# Altium PCB 心动仪.PcbDoc
Units mil, origin at the board's own origin, x right, y up, seen from the top; angles counter-clockwise.
Board outline 6000 x 4000 mil, 2 copper layers (Top Layer, Bottom Layer); 37 components, 40 nets, 227 pads, 24 vias.
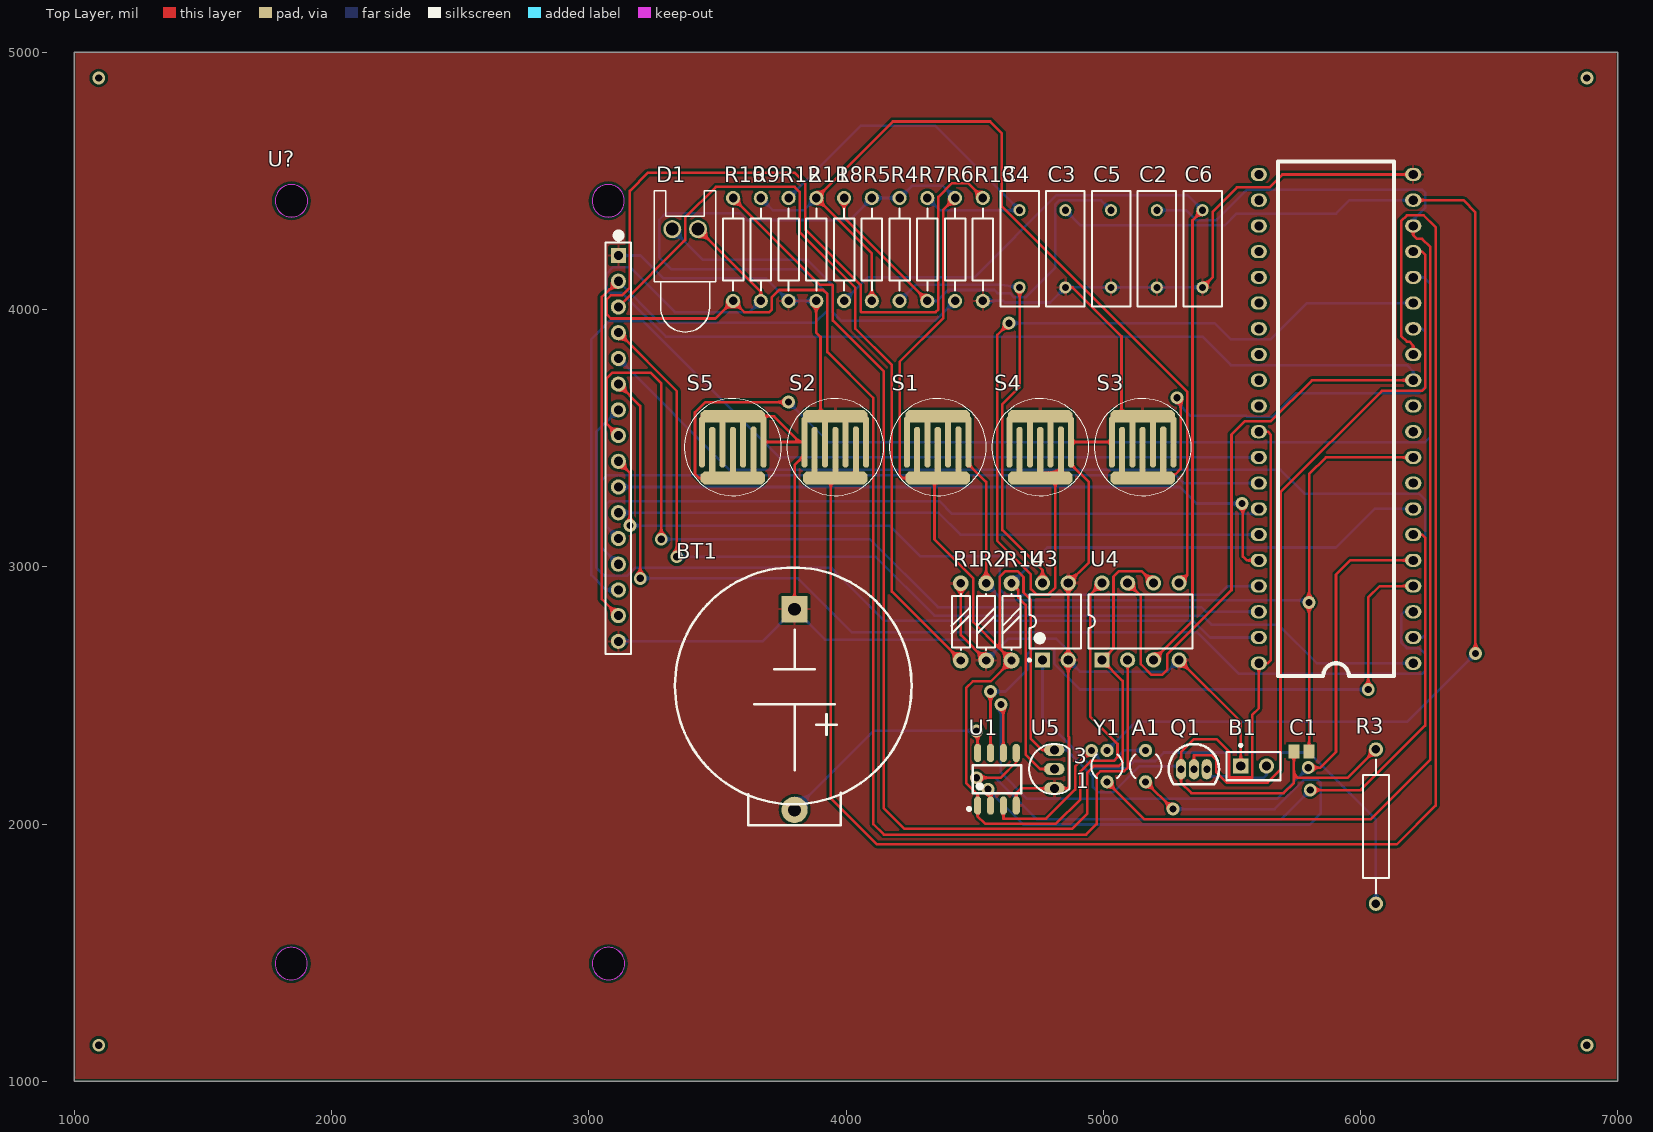
[diagram p0: Top Layer view]
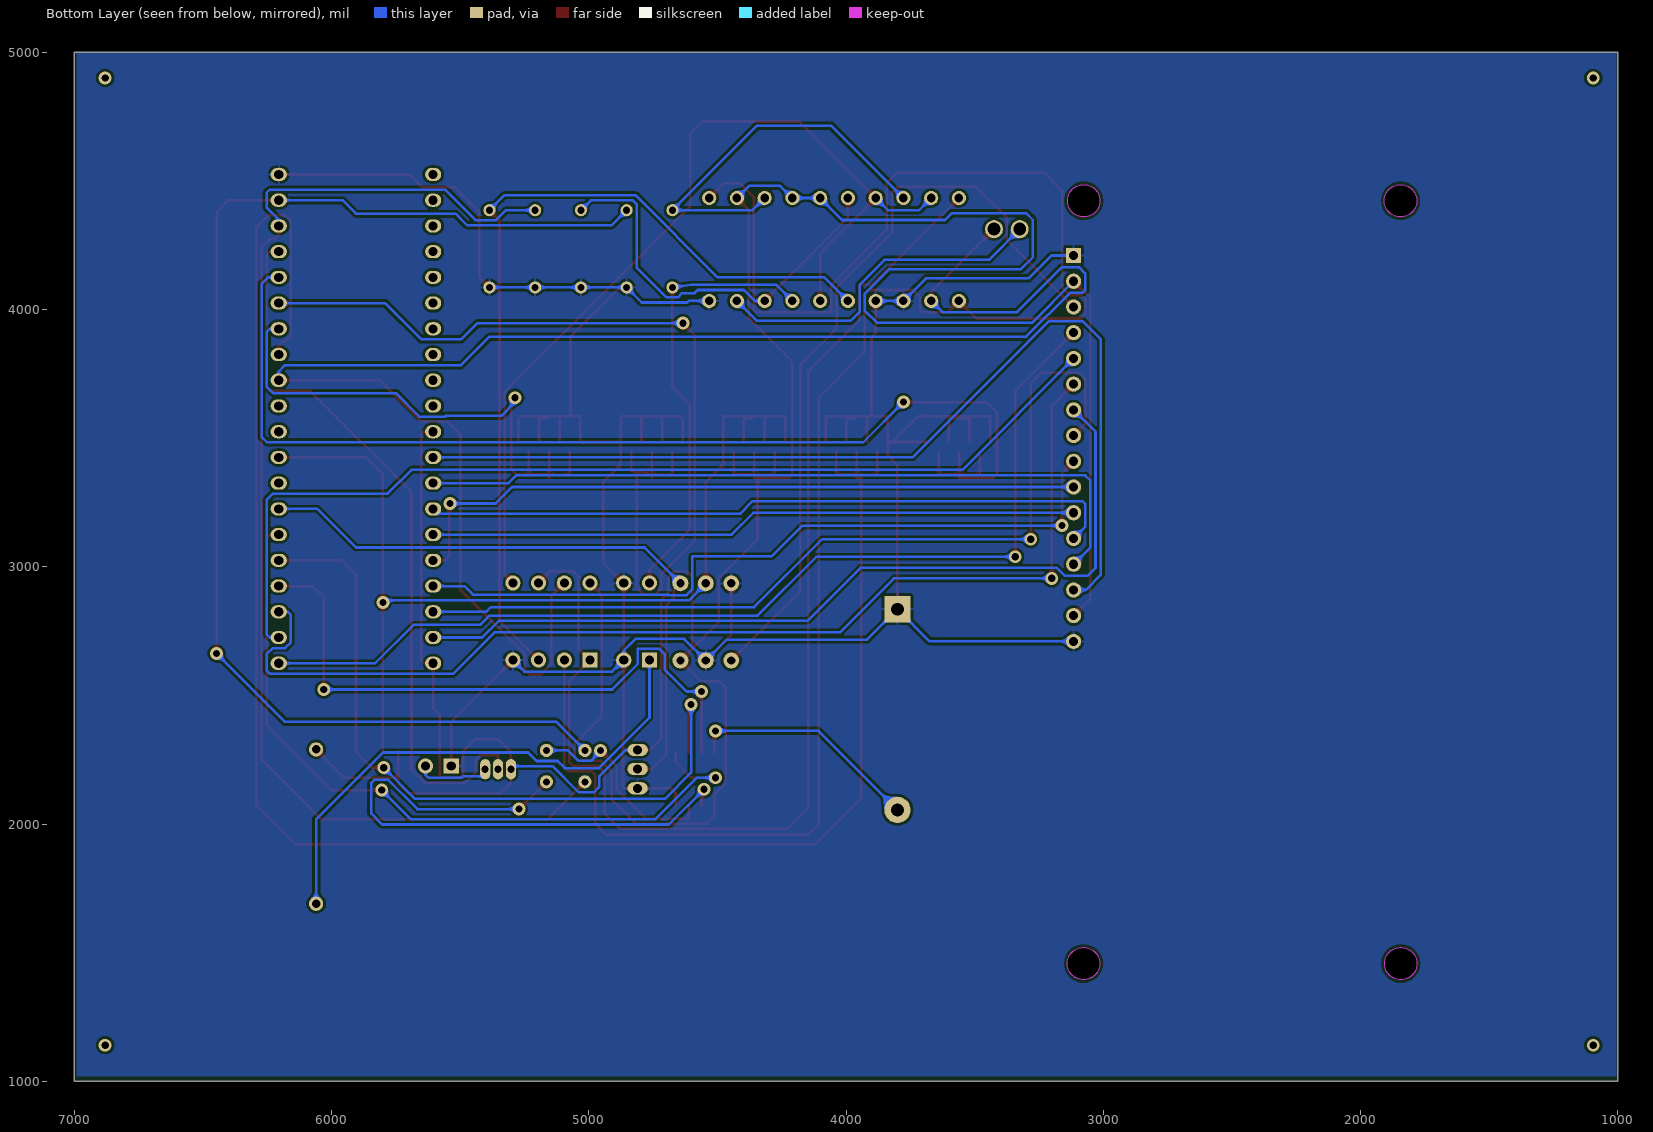
[diagram p1: Bottom Layer view, seen from below]

## Layer stack, top to bottom
Top Solder: solder mask 0.4, Solder Resist, Dk 3.5
Top Layer: signal copper 1.4
Dielectric 1: dielectric 12.6, FR-4, Dk 4.8
Bottom Layer: signal copper 1.4
Bottom Solder: solder mask 0.4, Solder Resist, Dk 3.5

## Board outline
1000,1000 7000,1000 7000,5000 1000,5000

## Design rules (kind name [scope] priority, off if disabled: settings)
Clearance [All] p1: gap=10 ignorepadtopadclearanceinfootprint=FALSE except(0: Arc-Hole Track-Hole SMDPad-Hole THPad-Hole Via-Hole Fill-Hole Poly-Hole Region-Hole Text-Hole)
PolygonConnect [All] p1: connectstyle=Relief reliefconductorwidth=10 reliefentries=4 polygonreliefangle="90 Angle" airgapwidth=10
RoutingVias [All] p1: holewidth=28 width=50 viastyle="Through Hole" minholewidth=28 minwidth=50 maxholewidth=28 maxwidth=50
SolderMaskExpansion [All] p1: expansion=4
Width [All] p1: maxlimit=10 minlimit=10 preferedwidth=10
30 further rules are at their usual default settings.

## Components (designator, comment, footprint, x,y, rotation, side; value= is the part's Value field where it differs from the comment)
A1 "XTAL" R38 5164.76,2225.1 r0 top
B1 "Bell" PIN2 5534.53,2225.16 r0 top
BT1 "Battery-N" BAT-CR2032 3800,2835 r0 top
C1 "Cap Pol3" C0805 5770.67,2282.25 r0 top value=10uF
C2 "Cap" RAD-0.3 5208.38,4236.06 r90 top value=20
C3 "Cap" RAD-0.3 4852.64,4236.06 r90 top value=20
C4 "Cap" RAD-0.3 4674.76,4236.06 r90 top value=10uF
C5 "Cap" RAD-0.3 5030.51,4236.06 r90 top value=1uF
C6 "Cap" RAD-0.3 5386.26,4236.06 r90 top value=1uF
D1 "LED0" LED-0 3374.58,4312.5 r0 top
Q1 "9012" TO-92(TO-92-3) 5352.59,2212.91 r0 top
R1 "Resistor" AXIAL-0.3 4446.16,2635.71 r90 top value=2K
R2 "Resistor" AXIAL-0.3 4544.91,2635.71 r90 top value=10K
R3 "330" AXIAL-0.6-R 6060,1990 r90 top
R4 "Res2" AXIAL-0.4 4208.27,4233.44 r90 top value=20K
R5 "Res2" AXIAL-0.4 4100.39,4233.44 r90 top value=20K
R6 "Res2" AXIAL-0.4 4424.01,4233.44 r90 top value=330
R7 "Res2" AXIAL-0.4 4316.14,4233.44 r90 top value=10K
R8 "Res2" AXIAL-0.4 3992.52,4233.44 r90 top value=10K
R9 "Res2" AXIAL-0.4 3668.9,4233.44 r90 top value=56K
R10 "Res2" AXIAL-0.4 3561.02,4233.44 r90 top value=100K
R11 "Res2" AXIAL-0.4 3884.64,4233.44 r90 top value=6.8K
R12 "Res2" AXIAL-0.4 3776.77,4233.44 r90 top value=24K
R13 "Res2" AXIAL-0.4 4531.89,4233.44 r90 top value=330
R14 "Resistor" AXIAL-0.3 4643.65,2635.71 r90 top value=10K
S1 "SW-PB" KEY-pad 4356.72,3585 r0 top
S2 "SW-PB" KEY-pad 3958.36,3585 r0 top
S3 "SW-PB" KEY-pad 5153.43,3585 r0 top
S4 "SW-PB" KEY-pad 4755.07,3585 r0 top
S5 "SW-PB" KEY-pad 3560,3585 r0 top
U1 "DS1302" SOP-8_150mil 4586.83,2173.92 r0 top
U3 "ST188" DIP-4 4814.03,2787.18 r90 top
U4 "LM358AD" DIP-8 4995.06,2637.18 r0 top
U5 "DS18B20" BCY-W3/E4 4809.94,2213.75 r0 top
U? "LCD1602" LCD1602 3115,3460 r90 top
Y1 "XTAL" R38 5014.83,2225.1 r0 top value=12M
? "89C51" DIP-40 6205,2625 r90 top

## Footprints (in the part's own frame and the unit in brackets; to place one, negate y for a bottom-side part, rotate by r counter-clockwise, add the part's x,y. Pads: shape width x height; smd on the part's side, far side on the other; paste and mask are expansions set on the pad)
AXIAL-0.3 [mil] "1/8W电阻"
  round 62 hole 32: 1(0,0) 2(300,0)
  silkscreen extent 41,-35 259,35, body extent -10,-39 310,39, height 89
AXIAL-0.4 [mm] "Axial Device, Thru-Hole; 2 Leads; 0.4 in Pin Spacing"
  round 1.4 hole 0.85: 1(-5.08,0) 2(5.08,0)
  silkscreen extent -4.06,-1.02 4.06,1.02
AXIAL-0.6-R [mm] "1W"
  round 1.4 hole 0.85: 1(-7.62,0) 2(7.62,0)
  silkscreen extent -6.6,-1.27 6.6,1.27, body extent -7.85,-2.25 7.85,2.25, height 5.25
BAT-CR2032 [mm] "CR2032电池座（未加焊）"
  rect 2.6x2.6 hole 1.27: 1(0,0)
  round 2.6 hole 1.27: 2(0,-19.812)
  silkscreen extent -11.81,-21.34 11.56,4.11, body extent -11.68,-21.34 11.68,4.06, height 3.5
BCY-W3/E4 [mm] "TO, Flat Index; 3 In-Line, Axial Leads; Body Dia. 4.5mm; Leads 0.51 x 0.48 mm (max)"
  oval 2x1.2 hole 0.9: 1(0,-1.905) 2(0,0) 3(-0.002,1.888)
  silkscreen extent -2.48,-2.48 1.5,2.48, body extent -2.48,-2.5 1.5,2.5, height 7
C0805 [mm] "Chip Capacitor, Body 2.0x1.3mm, IPC High Density"
  rect 1.1x1.4 smd: 1(-0.75,0) 2(0.75,0)
  body extent -1.1,-0.72 1.1,0.72, height 1.4
DIP-4 [mm] "DIP; 4 Leads; Row Spacing 7.62 mm; Pitch 2.54 mm"
  rect 1.5x1.5 hole 0.9: 1(-3.81,1.27)
  round 1.5 hole 0.9: 2(-3.81,-1.27) 3(3.81,-1.27) 4(3.81,1.27)
  silkscreen extent -3.93,-2.55 2.65,2.69, body extent -3.15,-2.5 3.15,2.5, height 5.6
DIP-8 [mm]
  rect 1.5x1.5 hole 0.9: 1(0,0)
  round 1.5 hole 0.9: 2(2.54,0) 3(5.08,0) 4(7.62,0) 5(7.62,7.62) 6(5.08,7.62) 7(2.54,7.62) 8(0,7.62)
  silkscreen extent -1.34,1.16 8.96,6.46, body extent -0.82,-0.22 8.45,7.84, height 3.8
DIP-40 [mm] "40脚直插芯片 间距2.54mm 600mil"
  oval 1.3x1.6 hole 0.9: 1(0,0) 2(2.54,0) 3(5.08,0) 4(7.62,0) 5(10.16,0) 6(12.7,0) 7(15.24,0) 8(17.78,0) 9(20.32,0) 10(22.86,0) 11(25.4,0) 12(27.94,0) 13(30.48,0) 14(33.02,0) 15(35.56,0) 16(38.1,0) 17(40.64,0) 18(43.18,0) 19(45.72,0) 20(48.26,0) 21(48.26,15.24) 22(45.72,15.24) 23(43.18,15.24) 24(40.64,15.24) 25(38.1,15.24) 26(35.56,15.24) 27(33.02,15.24) 28(30.48,15.24) 29(27.94,15.24) 30(25.4,15.24) 31(22.86,15.24) 32(20.32,15.24) 33(17.78,15.24) 34(15.24,15.24) 35(12.7,15.24) 36(10.16,15.24) 37(7.62,15.24) 38(5.08,15.24) 39(2.54,15.24) 40(0,15.24)
  silkscreen extent -1.27,1.91 49.53,13.34, body extent -1.22,-1.18 49.48,16.42, height 8.5
KEY-pad [mm]
  oct 0.6x5 on Top Paste: 0(-3.048,-2.54) 0(-2.032,-3.556) 0(-1.011,-2.54) 0(0,-3.556) 0(1.016,-2.54) 0(2.032,-3.505) 0(3.048,-2.54)
  oct 0.6x5 smd: 1(-3.048,-2.54) 1(-1.016,-2.54) 1(1.016,-2.54) 1(3.048,-2.54) 2(-2.032,-3.556) 2(0,-3.556) 2(2.032,-3.505)
  oct 6.35x1.27 smd: 1(0,0) 2(0,-6.096)
  oct 6.35x1.27 on Top Paste: 1(0,0) 2(0,-6.096)
  rect 6.5x6.6 on Top Solder: 80(0.002,-2.953)
  silkscreen extent -4.78,-7.83 4.8,1.75
LCD1602 [mm] "LCD1602"
  rect 1.5x1.5 hole 0.9: 1(19.05,0)
  round 1.5 hole 0.9: 2(16.51,0) 3(13.97,0) 4(11.43,0) 5(8.89,0) 6(6.35,0) 7(3.81,0) 8(1.27,0) 9(-1.27,0) 10(-3.81,0) 11(-6.35,0) 12(-8.89,0) 13(-11.43,0) 14(-13.97,0) 15(-16.51,0) 16(-19.05,0)
  Keep-Out Layer circle w0.1: c24.451,32.274 r1.6
  Keep-Out Layer circle w0.1: c24.451,1 r1.6
  Keep-Out Layer circle w0.1: c-50.867,0.974 r1.6
  Keep-Out Layer circle w0.1: c-50.867,32.3 r1.6
  Keep-Out Layer board cut-out: 22.851,32.274 22.973,31.662 23.32,31.143 23.839,30.796 24.451,30.674 24.451,30.674 25.063,30.796 25.582,31.143 25.929,31.662 26.051,32.274 26.051,32.274 25.929,32.886 25.582,33.406 25.063,33.752 24.451,33.874 24.451,33.874 23.839,33.752 23.32,33.406 22.973,32.886 22.851,32.274
  Keep-Out Layer board cut-out: 22.851,1 22.973,0.388 23.32,-0.132 23.839,-0.478 24.451,-0.6 24.451,-0.6 25.063,-0.478 25.582,-0.132 25.929,0.388 26.051,1 26.051,1 25.929,1.612 25.582,2.131 25.063,2.478 24.451,2.6 24.451,2.6 23.839,2.478 23.32,2.131 22.973,1.612 22.851,1
  Keep-Out Layer board cut-out: -52.467,0.974 -52.345,0.362 -51.998,-0.157 -51.479,-0.504 -50.867,-0.626 -50.867,-0.626 -50.255,-0.504 -49.736,-0.157 -49.389,0.362 -49.267,0.974 -49.267,0.974 -49.389,1.587 -49.736,2.106 -50.255,2.453 -50.867,2.574 -50.867,2.574 -51.479,2.453 -51.998,2.106 -52.345,1.587 -52.467,0.974
  Keep-Out Layer board cut-out: -52.467,32.3 -52.345,31.687 -51.998,31.168 -51.479,30.821 -50.867,30.7 -50.867,30.7 -50.255,30.821 -49.736,31.168 -49.389,31.687 -49.267,32.3 -49.267,32.3 -49.389,32.912 -49.736,33.431 -50.255,33.778 -50.867,33.9 -50.867,33.9 -51.479,33.778 -51.998,33.431 -52.345,32.912 -52.467,32.3
  silkscreen extent -20.32,-1.27 21.47,1.27, body extent -53.46,-1.61 27.04,34.89, height 10.52
LED-0 [mil] "LED; 2 Leads"
  round 70 hole 50: 1(50,0) 2(-50,0)
  silkscreen extent -120,-400 120,150
PIN2 [mm] "Photosensitive Diode; 2 Leads"
  rect 1.5x1.5 hole 0.9: 1(0,0)
  round 1.5 hole 0.9: 2(2.54,0)
  silkscreen extent -1.4,-1.4 3.94,2.17
R38 [mm] "Crystal, Thru-Hole; 2 Leads; Body 3.1 x 8.2 mm (Dia.xH)"
  round 1.3 hole 0.7: 1(0,1.55) 2(0,-1.55)
  silkscreen extent -1.55,-1.19 1.55,1.17
RAD-0.3 [mm] "Radial Cap, Thru-Hole; 2 Leads; 0.3 in Pin Spacing"
  round 1.2 hole 0.7: 1(-3.81,0) 2(3.81,0)
  silkscreen extent -5.71,-1.91 5.72,1.9
SOP-8_150mil [mm]
  oval 0.7x1.8 smd: 1(-1.905,-2.6) 2(-0.635,-2.6) 3(0.635,-2.6) 4(1.905,-2.6) 5(1.905,2.6) 6(0.635,2.6) 7(-0.635,2.6) 8(-1.905,2.6)
  silkscreen extent -2.9,-3.07 2.4,1.4, body extent -2.5,-3.1 2.5,3.1, height 1.75
TO-92(TO-92-3) [mm]
  oval 1x2 hole 0.7 mask+0.051: 1(-1.27,0) 2(0,0) 3(1.27,0)
  silkscreen extent -2.48,-1.5 2.48,2.48, body extent -2.61,-1.6 2.61,2.6, height 8

## Part data
A1 Y1: "Crystal Oscillator", LatestRevisionDate=17-Jul-2002, LatestRevisionNote="Re-released for DXP Platform.", PackageDescription="Crystal, Thru-Hole; 2 Leads; Body 3.1 x 8.2 mm (Dia.xH)", PackageReference=R38, Published=8-Jun-2000, Publisher="Altium Limited"
B1: "Electrical Bell", LatestRevisionDate=17-Jul-2002, LatestRevisionNote="Re-released for DXP Platform.", PackageReference=PIN2, Published=24-Mar-1999, Publisher="Altium Limited"
BT1: "Multicell Battery", Published=24-Mar-1999, Publisher="Altium Limited", Revision="July-2002: Re-released for DXP Platform."
C1: "Polarized Capacitor (Surface Mount)", LatestRevisionDate=29-May-2009, LatestRevisionNote="IPC-7351 Footprint Added.", PackageDescription="Chip Capacitor", PackageReference=C0805, Published=8-Jun-2000, Publisher="Altium Limited"
C2 C3 C4 C5 C6: "Capacitor", LatestRevisionDate=17-Jul-2002, LatestRevisionNote="Re-released for DXP Platform.", PackageDescription="Radial Cap, Thru-Hole; 2 Leads; 0.3 in Pin Spacing", PackageReference=RAD-0.3, Published=8-Jun-2000, Publisher="Altium Limited"
D1: "Typical INFRARED GaAs LED", LatestRevisionDate=08-Jul-2005, LatestRevisionNote="Mech Layer 1 removed.", PackageDescription="LED; 2 Leads", PackageReference=LED-0, Published=8-Jun-2000, Publisher="Altium Limited"
Q1: library part 9012_TO-92, "PNP型小功率三极管", datasheet=http://pdf1.alldatasheetcn.com/datasheet-pdf/view/311757/DAYA/9012.html
R3: library part Res2_1W, "Resistor 直插电阻 1W", LatestRevisionDate=17-Jul-2002, LatestRevisionNote="Re-released for DXP Platform.", PackageReference=AXIAL-0.4, Published=8-Jun-2000, Publisher="Altium Limited"
R4 R5 R6 R7 R8 R9 R10 R11 R12 R13: "Resistor", LatestRevisionDate=17-Jul-2002, LatestRevisionNote="Re-released for DXP Platform.", PackageDescription="Axial Device, Thru-Hole; 2 Leads; 0.4 in Pin Spacing", PackageReference=AXIAL-0.4, Published=8-Jun-2000, Publisher="Altium Limited"
S1 S2 S3 S4 S5: "Switch", Published=24-Mar-1999, Publisher="Altium Limited", Revision="July-2002: Re-released for DXP Platform."
U1: "DS1302 实时时钟"
U3: library part Optoisolator1, "4-Pin Phototransistor Optocoupler", DatasheetVersion=Nov-2003, LatestRevisionDate=04-Mar-2005, LatestRevisionNote="Sch pins 3 & 4 Swapped.", PackageReference=DIP-4, Published=24-Mar-1999, Publisher="Altium Limited"
U4: "Dual Operational Amplifier", PackageDocument=Jan-1998, ComponentLink1Description="Manufacturer Link", ComponentLink1URL=http://www.ti.com/, DatasheetDocument=Aug-1988, LatestRevisionDate=4-Mar-2005, LatestRevisionNote="Stylized 3D Model Added.", PackageReference=D008, Published=15-Apr-2002, Publisher="Altium Limited"
R1 R2 R14: Published=8-Jun-2000, Publisher="Altium Limited", Revision="July-2002: Re-released for DXP Platform."

## Via types
v1: diameter 50, hole 28, Top Layer to Bottom Layer, 24 vias

## Nets (pads, with @x,y where several pads share a name; then routed paths per layer and width w, separated by ;. In a path a pad name is that pad's centre, name@x,y a point inside that pad or via, vN(x,y) a via of type N, cw(c..) or ccw(c..) an arc to the next point about the centre after c; other vN are vias at no path point)
GND: ?.20 B1.1 BT1.1 C2.1 C3.1 C5.1 C6.1 R1.2 R2.1 R11.1 R12.1 R13.1 S2.1@3838.36,3485 S2.1@3918.36,3485 S2.1@3958.36,3585 S2.1@3998.36,3485 S2.1@4078.36,3485 S3.1@5033.43,3485 S3.1@5113.43,3485 S3.1@5153.43,3585 S3.1@5193.43,3485 S3.1@5273.43,3485 S4.1@4635.07,3485 S4.1@4715.07,3485 S4.1@4755.07,3585 S4.1@4795.07,3485 S4.1@4875.07,3485 S5.1@3440,3485 S5.1@3520,3485 S5.1@3560,3585 S5.1@3600,3485 S5.1@3680,3485 U1.4 U3.2 U3.3 U4.4 U5.1 U?.1 U?.16 | length 12655.4
  Top Layer w10: S5.1@3440,3485 3440,3585 S5.1@3560,3585 ; S5.1@3520,3485 3520,3578 3553,3578 S5.1@3560,3585 ; S5.1@3600,3485 3600,3578 3567,3578 S5.1@3560,3585 ; S5.1@3680,3485 3820,3485 ; BT1.1 3800,3395.64 3838.36,3434 S2.1@3838.36,3485 ; R11.1 3884,4033.44 3884,3911 3901,3894 S2.1@3901,3585 ; S2.1@3918.36,3485 S2.1@3918.36,3585 ; S2.1@3998.36,3485 3998.36,3578 3965.36,3578 S2.1@3958.36,3585 ; S2.1@4078.36,3485 4078.36,3585 S2.1@3958.36,3585 ; R1.2 4446.16,2734.45 R2.1 ; S4.1@4635.07,3485 4635.07,3575.07 4645,3585 S4.1@4715,3585 ; U1.4 4661.83,2120.58 4680,2138.75 U5.1 4860,2138.75 4867,2145.75 4867,2338.03 4864.03,2341 U3.2 U3.3 4944,3017.15 4944,3329.07 4875.07,3398 S4.1@4875.07,3485 ; S4.1@4715.07,3485 4715.07,3535 4715,3535.07 S4.1@4715,3585 ; S4.1@4795.07,3485 S4.1@4795.07,3585 ; C3.1 4880.94,4086.06 5071,3896 S3.1@5071,3585 ; S3.1@5113.43,3485 S3.1@5113.43,3585 ; S3.1@5193.43,3485 5193.43,3578 5160.43,3578 S3.1@5153.43,3585 ; S3.1@5273.43,3485 5273.43,3574.57 5263,3585 S3.1@5153.43,3585 ; U4.4 5534.53,2397.71 B1.1 ; C6.1 5425,4124.81 5425,4380 5520,4475 5646,4475 5696,4525 ?.20 ; S5.1@3560,3585 3720,3585 3820,3485 ; 3820,3485 S2.1@3838.36,3485 ; S2.1@3838.36,3485 3838.36,3585 S2.1@3901,3585 ; S2.1@3901,3585 S2.1@3918.36,3585 ; S2.1@3918.36,3585 S2.1@3958.36,3585 ; S4.1@4715,3585 4755.07,3585 S4.1@4795.07,3585 ; S4.1@4795.07,3585 4875.07,3585 S4.1@4875.07,3485 ; S4.1@4875.07,3485 5033.43,3485 5033.43,3585 S3.1@5071,3585 ; S3.1@5071,3585 S3.1@5113.43,3585 ; S3.1@5113.43,3585 S3.1@5153.43,3585
  Bottom Layer w10: U?.16 3675,2710 BT1.1 3918,2717 4463.62,2717 R2.1 4629.2,2720 4818.1,2720 4864.03,2674.07 U3.2 4909.22,2592 5249.88,2592 U4.4 ; U?.1 3201,4210 3290,4121 3689.21,4121 R12.1 R11.1 ; R13.1 4611.11,4033.44 4617.11,4027.44 4794.01,4027.44 C3.1 C5.1 C2.1 C6.1
Net_1: ?.1 U?.4 | length 3999.5
  Top Layer w10: U?.4 3342,3683 v1(3342,3039)
  Bottom Layer w10: v1(3342,3039) 4115,3039 4344,2810 5385,2810 5420,2775 5680,2775 5830,2625 ?.1
Net_2: ?.2 U?.5 | length 3939.8
  Bottom Layer w10: U?.5 3548,3377 5689,3377 5782,3284 6228,3284 6252,3260 6252,2737 6240,2725 ?.2
Net_3: ?.3 U?.6 | length 4336.9
  Top Layer w10: U?.6 3200,3625 v1(3200,2955)
  Bottom Layer w10: v1(3200,2955) 3814,2955 4024,2745 5366,2745 5527,2584 6240,2584 6252,2596 6252,2660 6228,2684 6180,2684 6158,2706 6158,2813 6170,2825 ?.3
Net_4: ?.4 U1.7 | length 2462.3
  Top Layer w10: U1.7 v1(4561.83,2515) ; v1(6030,2523) 6030,2880 6075,2925 ?.4
  Bottom Layer w10: v1(4561.83,2515) 4620,2515 4705,2600 4705,2660 4727,2682 4809,2682 4809,2623 4909,2523 v1(6030,2523)
Net_5: ?.5 U1.6 | length 2889.2
  Top Layer w10: v1(4602,2464) 4611.83,2454.17 U1.6 ; v1(5797,2219) 5844,2219 5905,2280 5905,2970 5960,3025 ?.5
  Bottom Layer w10: v1(4602,2464) 4602,2200 4704,2098 5676,2098 v1(5797,2219)
Net_6: ?.6 U1.5 | length 2960.8
  Top Layer w10: v1(4507,2180) 4601.83,2180 4661.83,2240 U1.5 ; v1(5805,2132) 6001,2132 6251.5,2382.5 6251.5,3113.5 6240,3125 ?.6
  Bottom Layer w10: v1(4507,2180) 4580.08,2180 4742.08,2018 5691,2018 v1(5805,2132)
Net_7: ?.7 R14.2 U5.2 | length 2504.2
  Top Layer w10: R14.2 4669.56,2909.8 4669.56,2880.44 4698,2852 4698,2270.75 4755,2213.75 U5.2
  Bottom Layer w10: R14.2 4782.94,3075 5905,3075 6055,3225 ?.7
Net_9: ?.9 C1.2 R2.2 S1.1@4236.72,3485 S1.1@4316.72,3485 S1.1@4356.72,3585 S1.1@4396.72,3485 S1.1@4476.72,3485 | length 4049.1
  Top Layer w10: S1.1@4236.72,3485 4236.72,3585 S1.1@4316.72,3585 ; S1.1@4316.72,3485 S1.1@4316.72,3585 ; S1.1@4396.72,3485 4396.72,3578 4363.72,3578 S1.1@4356.72,3585 ; R2.2 4544.91,3329.81 4476.72,3398 4476.72,3485 4476.72,3585 S1.1@4356.72,3585 ; C1.2 v1(5800.19,2861.23) 5800.19,3360 5865.19,3425 ?.9 ; S1.1@4316.72,3585 S1.1@4356.72,3585
  Bottom Layer w10: R2.2 4610.91,2869.71 5791.71,2869.71 v1(5800.19,2861.23)
Net_12: ?.12 D1.1 R9.1 U4.7 | length 6722
  Top Layer w10: D1.1 3668.9,4068.19 R9.1 ; U4.7 5146,2886.24 5146,2621 5187,2580 5229,2580 5249,2600 5249,2660 5498.5,2909.5 5498.5,3513.5 5551,3566 5652,3566 5811,3725 ?.12
  Bottom Layer w10: R9.1 3625.45,3990 3335,3990 3160,4165 3095,4165 3070,4140 3070,4075 3080,4065 3129,4065 3299.55,3894.45 5385.55,3894.45 5496,3784 6181,3784 6205,3760 ?.12
Net_13: ?.13 S2.2@3878.36,3445 S2.2@3958.36,3345 S2.2@3958.36,3445 S2.2@4038.36,3447 | length 7139.5
  Top Layer w10: S2.2@3878.36,3445 3878.36,3358 3879.45,3358.01 3958.18,3359 S2.2@3958.36,3359 ; S2.2@3958.36,3445 S2.2@3958.36,3359 ; S2.2@4038.36,3447 4038.36,3359 S2.2@3958.36,3359 ; ?.13 6205,3860 6190,3875 6180,3875 6158,3897 6158,4344 6180,4366 6246,4366 6292,4320 6292,2072 6141,1921 4120,1921 3941,2100 3941,3345 3958.36,3345 S2.2@3958.36,3359
Net_14: ?.14 S3.2@5073.43,3445 S3.2@5153.43,3345 S3.2@5153.43,3445 S3.2@5233.43,3447 | length 2112.3
  Top Layer w10: S3.2@5073.43,3445 5073.43,3358 5074.52,3358.01 5153.26,3359 S3.2@5153.43,3359 ; S3.2@5153.43,3345 S3.2@5153.43,3359 ; S3.2@5153.43,3445 S3.2@5153.43,3359 ; S3.2@5233.43,3447 S3.2@5233.43,3359 ; v1(5287,3657) 5301,3643 5301,3380 5280,3359 S3.2@5233.43,3359 ; S3.2@5153.43,3359 S3.2@5233.43,3359
  Bottom Layer w10: v1(5287,3657) 5287,3640 5340,3587 5556,3587 5559,3584 5659,3584 5750,3675 6227,3675 6252,3700 6252,3913 6240,3925 ?.14
Net_15: ?.15 S4.2@4675.07,3445 S4.2@4755.07,3345 S4.2@4755.07,3445 S4.2@4835.07,3447 | length 3753.5
  Top Layer w10: v1(4634,3947) 4588,3901 4588,3101 4719,2970 4719,2913 4740,2892 4786,2892 4814,2920 4814,3372 ; S4.2@4675.07,3445 4675.07,3358 4676.16,3358.01 4754.9,3359 S4.2@4755.07,3359 ; S4.2@4755.07,3345 S4.2@4755.07,3359 ; S4.2@4755.07,3445 S4.2@4755.07,3359 ; S4.2@4835.07,3447 4835.07,3372 4814,3372 ; S4.2@4755.07,3359 4773.17,3362.99 4814,3372
  Bottom Layer w10: v1(4634,3947) 5433,3947 5496,3884 5651,3884 5792,4025 ?.15
Net_16: ?.16 S5.2@3480,3445 S5.2@3560,3345 S5.2@3560,3445 S5.2@3640,3447 | length 4449.5
  Top Layer w10: S5.2@3480,3445 3480,3358 3481.09,3358.01 3559.82,3359 S5.2@3560,3359 ; S5.2@3560,3445 S5.2@3560,3359 ; S5.2@3640,3447 3640,3359 S5.2@3560,3359 ; v1(3777,3640) 3453,3640 3413,3600 3413,3360 3428,3345 3560,3345 S5.2@3560,3359
  Bottom Layer w10: v1(3777,3640) 3933,3484 6251,3484 6272,3505 6272,4100 6247,4125 ?.16
Net_17: ?.17 Q1.2 | length 2863.3
  Top Layer w10: Q1.2 5352.59,2268 5420,2268 5440,2248 5440,2200.63 5480,2160.63 5638.63,2160.63 5689,2211 5689,3290 6083,3684 6240,3684 6251.5,3695.5 6251.5,4213.5 6240,4225 ?.17
Net_18: ?.18 C2.2 Y1.2 | length 4789.4
  Top Layer w10: Y1.2 5160.91,2018 6039,2018 6271.5,2250.5 6271.5,4243.5 6240,4275 6220,4275 6205,4290 ?.18
  Bottom Layer w10: C2.2 5321.57,4386.06 5360.19,4347.44 5440.44,4347.44 5559,4466 6240,4466 6252,4454 6252,4396 6205,4349 ?.18
Net_19: ?.19 C3.2 Y1.1 | length 4981.8
  Top Layer w10: ?.19 6400,4425 6447,4378 v1(6447,2663)
  Bottom Layer w10: C3.2 4911.26,4327.44 5472.44,4327.44 5518,4373 5905,4373 5957,4425 ?.19 ; Y1.1 5125.71,2397 6181,2397 v1(6447,2663)
Net_32: ?.32 U?.14 | length 3889.9
  Bottom Layer w10: U?.14 3067.47,2910 3010,2967.47 3010,3885 3080,3955 3210.71,3955 3740.71,3425 ?.32
Net_33: ?.33 U?.13 | length 2927.6
  Bottom Layer w10: U?.13 3050,3075 3050,3335 3070,3355 5282,3355 5312,3325 ?.33
Net_34: ?.34 U?.12 | length 2732.4
  Bottom Layer w10: U?.12 3070,3155 3070,3245 3080,3255 4363,3255 4412.23,3205.77 5594.98,3205.77 5594.98,3225 ?.34
Net_35: ?.35 U?.11 | length 2525.2
  Bottom Layer w10: U?.11 4360,3210 4445,3125 ?.35
Net_36: ?.36 U?.10 | length 2726.4
  Top Layer w10: v1(5539,3246) 5543,3242 5543,3040 5558,3025 ?.36
  Bottom Layer w10: U?.10 5298,3310 5362,3246 v1(5539,3246)
Net_37: ?.37 U?.9 | length 2914.8
  Top Layer w10: U?.9 3160,3365 v1(3160,3160)
  Bottom Layer w10: v1(3160,3160) 4169,3160 4288,3041 4596,3041 4597,3040 4597,2912.71 4620,2889.71 4690,2889.71 4692.29,2892 5450,2892 5483,2925 ?.37
Net_38: ?.38 U?.8 | length 3525.6
  Top Layer w10: U?.8 3070.47,3554.53 3070.47,3733.47 3092,3755 3240,3755 3282,3713 v1(3282,3107)
  Bottom Layer w10: v1(3282,3107) 4093,3107 4357,2843 5381,2843 5399,2825 ?.38
Net_39: ?.39 U?.7 | length 3362.1
  Bottom Layer w10: U?.7 3030,3525 3030,2996 3061,2965 3149,2965 3180,2996 3944,2996 4150,2790 5350,2790 5415,2725 ?.39
NetA1_1: A1.1 U1.3 | length 803
  Top Layer w10: U1.3 4611.83,2021.12 4778.08,2021.12 4890.96,2134 4890.96,2222.96 v1(4954,2286)
  Bottom Layer w10: v1(4954,2286) 4960,2286 4988.47,2245.53 5040.53,2245.53 5081.12,2286.12 A1.1
NetA1_2: A1.2 U1.2 | length 2331
  Top Layer w10: v1(4552,2135) 4561.83,2125.17 U1.2 ; A1.2 v1(5270.83,2058)
  Bottom Layer w10: v1(4552,2135) 4689,1998 5803,1998 5845,2040 5845,2160 5833,2172 5780,2172 5666,2058 v1(5270.83,2058)
NetB1_2: B1.2 Q1.3 | length 301.2
  Bottom Layer w10: Q1.3 5402.59,2185 5490,2185 5495,2180 5624.53,2180 5634.53,2190 B1.2
NetBT1_2: BT1.2 U1.8 | length 921.9
  Top Layer w10: v1(4507,2362) 4511.83,2357.17 U1.8
  Bottom Layer w10: BT1.2 4107,2362 v1(4507,2362)
NetC4_1: C4.1 R4.1 U3.4 | length 1734.2
  Top Layer w10: C4.1 4674.76,3698.76 4608,3632 4608,3143 4764.03,2986.97 U3.4
  Bottom Layer w10: R4.1 4270.83,4096 4601,4096 C4.1
NetC4_2: C4.2 R7.2 R12.2 | length 1529.1
  Bottom Layer w10: R12.2 4058.33,4715 4345.83,4715 C4.2 4363.52,4386.06 R7.2
NetC5_2: C5.2 R7.1 R8.2 | length 1594.2
  Top Layer w10: R8.2 3992.52,4357.06 R7.1
  Bottom Layer w10: R7.1 4354.44,4033.44 4397,4076 4577,4076 4589,4064 4637,4064 4653.56,4047.44 4697.44,4047.44 4814.01,4164.01 4814.01,4410 4828.7,4424.69 4991.89,4424.69 C5.2
NetC6_2: C6.2 R8.1 U4.3 | length 3416.4
  Top Layer w10: U4.3 5347,2789.12 5347,4346.81 C6.2
  Bottom Layer w10: R8.1 4084.08,4125 4498.85,4125 4818.53,4444.69 5327.64,4444.69 C6.2
NetD1_2: D1.2 R6.1 | length 1340.8
  Bottom Layer w10: D1.2 3444.08,4193 3850.21,4193 3947.2,4096 3947.2,3990.8 3981.99,3956.01 4346.59,3956.01 R6.1
NetR1_1: R1.1 U?.3 | length 3038.9
  Top Layer w10: U?.3 3374.58,4269.58 3374.58,4357.58 3494,4477 3800,4477 3820,4457 3820,4301 4036,4085 4036,3926 4178,3784 4178,2903.87 R1.1
NetR3_1: R3.1 U3.1 | length 2061.9
  Bottom Layer w10: U3.1 4764.03,2413.25 4960,2217.29 5093.27,2217.29 5120.98,2245 5203,2245 5236,2278 5800,2278 6060,2018 R3.1
NetR5_1: R5.1 R9.2 R11.2 U4.5 | length 3667.8
  Top Layer w10: R5.1 4100.39,4217.69 R11.2 4182.2,4731 4560,4731 4606,4685 4606,4400 5327,3679 5327,2969.12 U4.5
  Bottom Layer w10: R9.2 3716.34,4386 3837.2,4386 R11.2
NetR10_1: R10.1 R13.2 U4.2 | length 7580.6
  Top Layer w10: R13.2 4474.33,4491 4412,4491 4358.7,4437.7 4358.7,4000 4348.7,3990 4060,3990 4057,3993 4057,4096 3842,4311 3842,4490 3800,4532 3231,4532 3160,4461 3160,4085 3130,4055 3085.47,4055 3070.47,4040 3070.47,3980 3085.47,3965 3492.58,3965 R10.1 3604.46,3990 3702,3990 3712,4000 3712,4048 3740,4076 3911.2,4076 3927.2,4060 3927.2,3834.8 4106,3656 4106,2000 4147,1959 4933,1959 4974,2000 4974,2190 4989,2205 5081,2205 5096,2220 5096,2602 5095.06,2602.94 U4.2
NetR10_2: R10.2 U4.1 U4.6 | length 4762
  Top Layer w10: R10.2 3898.46,4096 3947.2,4096 3949,4094.21 3949,3957 4147,3759 4147,2061 4226.88,1981.12 4879.12,1981.12 4938,2040 4938,2200 4963.53,2225.53 5060.95,2225.53 5075.43,2240 5075.43,2556.81 U4.1 5040,2682.12 5040,2962 5060,2982 5150.24,2982 U4.6
VCC: ?.31 ?.40 C1.1 Q1.1 R3.2 R4.2 R5.2 R6.2 R14.1 S1.2@4276.72,3445 S1.2@4356.72,3345 S1.2@4356.72,3445 S1.2@4436.72,3447 U1.1 U4.8 U5.3 U?.2 U?.15 | length 13930.2
  Top Layer w10: U?.15 3050.47,2874.53 3050.47,4048.92 3080,4078.44 3083.44,4078.44 U?.2 ; S1.2@4276.72,3445 4276.72,3358 4277.8,3358.01 4356.54,3359 S1.2@4356.72,3359 ; S1.2@4356.72,3445 S1.2@4356.72,3359 ; R6.2 4378.7,4388.13 4378.7,3967.1 4209,3797.4 4209,3356 4220,3345 S1.2@4344,3345 ; S1.2@4436.72,3447 4436.72,3359 S1.2@4356.72,3359 ; U5.3 4762,2288.09 4719,2331.09 4719,2871 4690,2900 4690,2960 4668,2982 4619,2982 4597,2960 4597,2682.36 ; U4.8 4950,2892.12 4950,2416.71 5055.43,2311.29 5055.43,2260 5040.95,2245.53 4952.53,2245.53 4910.96,2203.96 4910.96,2095.96 4816.12,2001.12 4540.71,2001.12 4511.83,2030 U1.1 4511.83,2115.17 4467,2160 4467,2528.66 4493.34,2555 4562.94,2555 R14.1 4597,2682.36 ; ?.31 5640,3525 5652,3513 5652,2637 5640,2625 ?.40 5605,2450 5580,2425 5580,2180.63 5489,2180.63 5489,2281 5440,2330 5352.59,2330 5302.59,2280 Q1.1 5302.59,2160 5342.59,2120 5701.14,2120 5741.14,2160 5741.14,2194.86 ; C1.1 5741.14,2194.86 ; R3.2 5949,2179 5757,2179 5741.14,2194.86 ; S1.2@4344,3345 4356.72,3345 S1.2@4356.72,3359 ; S1.2@4344,3345 4344,3106 4495,2955 4495,2784.36 4597,2682.36
  Bottom Layer w10: U?.2 3275.8,3949.2 3880,3949.2 3927.2,3996.41 3927.2,4060 3830.2,4157 3320,4157 3274,4203 3274,4349 3300,4375 3588,4375 3615,4348 4014.95,4348 R5.2 R4.2 4255.82,4481 4376.46,4481 R6.2 ; U5.3 4856.91,2288.09 4960,2185 4960,2143.48 4980,2123.48 5039.46,2123.48 5140.98,2225 5302.59,2225 Q1.1
pads on no net: ?.8 ?.10 ?.11 ?.21 ?.22 ?.23 ?.24 ?.25 ?.26 ?.27 ?.28 ?.29 ?.30 S1.0 S1.1@4356.72,3585 S1.2@4356.72,3345 S1.80 S2.0 S2.1@3958.36,3585 S2.2@3958.36,3345 S2.80 S3.0 S3.1@5153.43,3585 S3.2@5153.43,3345 S3.80 S4.0 S4.1@4755.07,3585 S4.2@4755.07,3345 S4.80 S5.0 S5.1@3560,3585 S5.2@3560,3345 S5.80
copper on no net:
  other v1: 1095,1140 6880,1140 1095,4900 6880,4900

## Polygon pours and split planes (outlines as drawn)
GND on Top Layer "Keep-Out Layer-No Net" (solid, pour order 0): 1005,5000 6990,5000 6995,4995 6995,1010 1005,1010 1000,1015 1005,1020
GND on Bottom Layer "Keep-Out Layer-No Net" (solid, pour order 2): 1005,5000 6990,5000 6990,1020 1005,1020

## Text inside footprints (layer, text, board x,y; h text height)
U5: Top Overlay "1" at 4893.66,2138.95 h59.05; Top Overlay "3" at 4884.61,2233.83 h59.05